# EAGLE board Sheild Generator - Main unit (EAGLE 7.6.0)
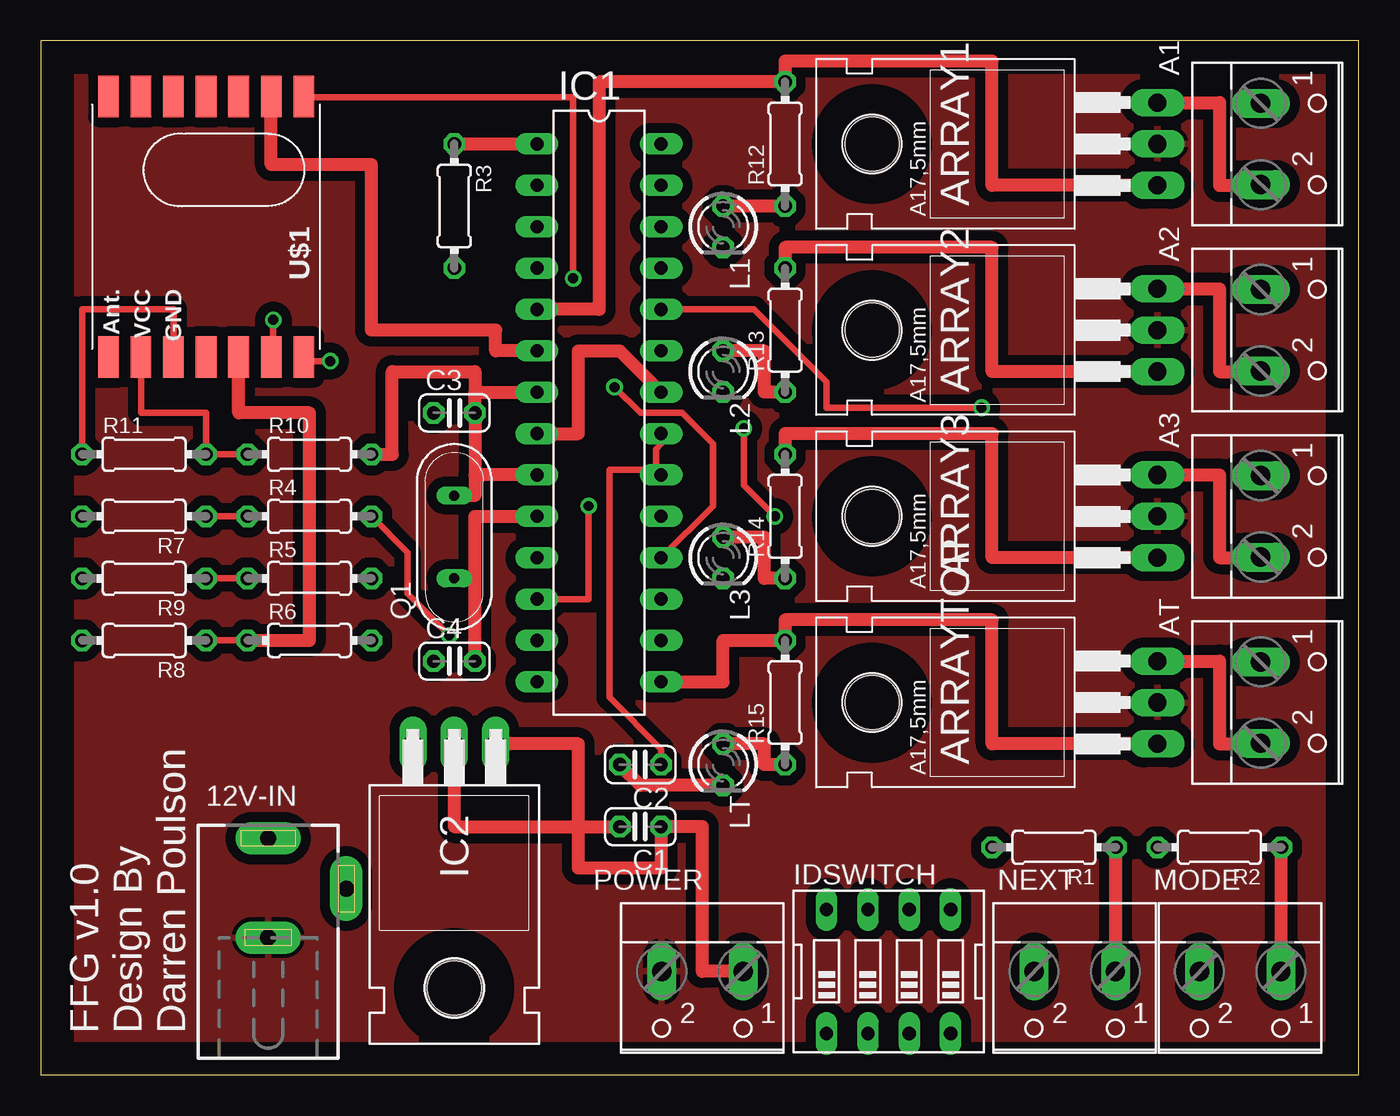
[diagram p0: board, top side]
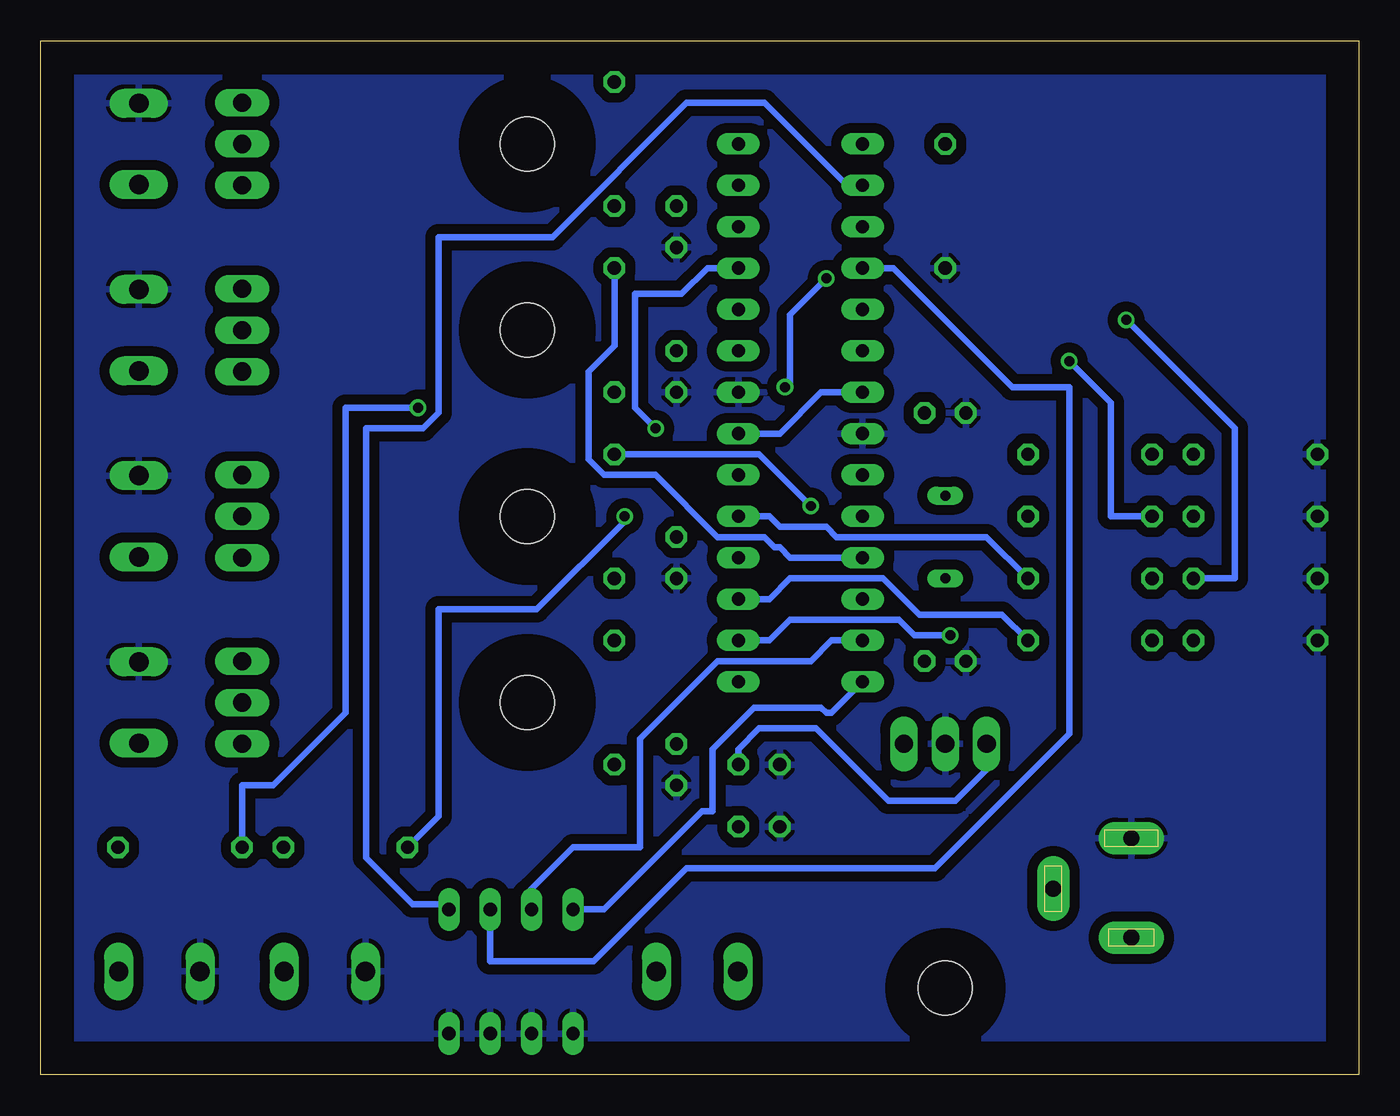
[diagram p1: board, bottom side, seen from below]

Size 80.95 x 63.49 mm. Coordinates in mm from the lower left corner, seen from the top.
Outline: 0,0 80.95,0 80.95,63.49 0,63.49 0,0
Copper layers (1*16): Top 0.035mm / dielectric 1.5mm / Bottom 0.035mm
Design rules "default *": minimum track width 16mil, minimum drill 24mil, track to track 24mil, track to pad 16mil, pad to pad 16mil, via to via 16mil, smd to smd 16mil, copper to edge 80mil, drill to drill 8mil, minimum pad ring 10mil, minimum via ring 8mil, stop-mask expansion 4mil, vias tented up to drill 0mil, thermal gap 10mil
Net classes: 1 GND: width 2.032 mm, drill 2.032 mm, clearance 2.032 mm; 2 +12V: width 4.064 mm, drill 4.064 mm, clearance 4.064 mm

## Footprints (pad centres in the part's own frame; a part is rotated, then mirrored left to right if it is on the bottom)
DCJ0202 = drill 1 pad 2 long: 1 0,3.1; 2 4.8,0; 3 0,-3
W237-102 = drill 1.194 long: 1 -2.5,-1.27; 2 2.5,-1.27
TO220 = drill 1.118 long: 1 -2.54,-6.35; 2 0,-6.35; 3 2.54,-6.35 | hole 3.302: 0,11.176
C025-024X044 = drill 0.813 octagon: 1 -1.27,0; 2 1.27,0
DIL28-3 = drill 0.813 long: 1 -16.51,-3.81; 2 -13.97,-3.81; 3 -11.43,-3.81; 4 -8.89,-3.81; 5 -6.35,-3.81; 6 -3.81,-3.81; 7 -1.27,-3.81; 8 1.27,-3.81; 9 3.81,-3.81; 10 6.35,-3.81; 11 8.89,-3.81; 12 11.43,-3.81; 13 13.97,-3.81; 14 16.51,-3.81; 15 16.51,3.81; 16 13.97,3.81; 17 11.43,3.81; 18 8.89,3.81; 19 6.35,3.81; 20 3.81,3.81; 21 1.27,3.81; 22 -1.27,3.81; 23 -3.81,3.81; 24 -6.35,3.81; 25 -8.89,3.81; 26 -11.43,3.81; 27 -13.97,3.81; 28 -16.51,3.81
TO220H = drill 1.118 long: 1 -2.54,-10.16; 2 0,-10.16; 3 2.54,-10.16 | hole 3.302: 0,4.826
EDG-04 = drill 0.813 long: 1 -3.81,-3.81; 2 -1.27,-3.81; 3 1.27,-3.81; 4 3.81,-3.81; 5 3.81,3.81; 6 1.27,3.81; 7 -1.27,3.81; 8 -3.81,3.81
LED3MM = drill 0.813 octagon: A -1.27,0; K 1.27,0
QS = drill 0.61 long: 1 -2.54,0; 2 2.54,0
0204/7 = drill 0.813 octagon: 1 -3.81,0; 2 3.81,0
RFM12B = smd 2.54 x 1.27: ANT 8,-6; FFS -8,2; GND 8,-2; IRQ -8,4; P$8 -8,0; P$9 -8,-2; P$10 -8,-4; P$12 -8,-6; P$16 8,0; SCK 8,4; SDI 8,2; SDO -8,6; SEL 8,6; VDD 8,-4

## Placement (x,y rotation side)
12V-IN  DCJ0202  [DCJ0202]  13.97,11.43 0 top
A1  [W237-102]  76.2,57.15 270 top
A2  [W237-102]  76.2,45.72 270 top
A3  [W237-102]  76.2,34.29 270 top
ARRAY1  TIP122  [TO220]  62.23,57.15 90 top
ARRAY2  TIP122  [TO220]  62.23,45.72 90 top
ARRAY3  TIP122  [TO220]  62.23,34.29 90 top
ARRAYTOP  TIP122  [TO220]  62.23,22.86 90 top
AT  [W237-102]  76.2,22.86 270 top
C1  [C025-024X044]  36.83,15.24 180 top
C2  [C025-024X044]  36.83,19.05 180 top
C3  [C025-024X044]  25.4,40.64 0 top
C4  [C025-024X044]  25.4,25.4 0 top
IC1  ATMEGA168-PU  [DIL28-3]  34.29,40.64 270 top
IC2  7805T  [TO220H]  25.4,10.16 180 top
IDSWITCH  [EDG-04]  52.07,6.35 0 top
L1  [LED3MM]  41.91,52.07 270 top
L2  [LED3MM]  41.91,43.18 270 top
L3  [LED3MM]  41.91,31.75 270 top
LT  [LED3MM]  41.91,19.05 270 top
MODE  [W237-102]  73.66,5.08 180 top
NEXT  [W237-102]  63.5,5.08 180 top
POWER  [W237-102]  40.64,5.08 180 top
Q1  [QS]  25.4,33.02 90 top
R1  [0204/7]  62.23,13.97 180 top
R2  [0204/7]  72.39,13.97 180 top
R3  [0204/7]  25.4,53.34 270 top
R4  [0204/7]  16.51,34.29 0 top
R5  [0204/7]  16.51,30.48 0 top
R6  [0204/7]  16.51,26.67 0 top
R7  [0204/7]  6.35,34.29 180 top
R8  [0204/7]  6.35,26.67 180 top
R9  [0204/7]  6.35,30.48 180 top
R10  [0204/7]  16.51,38.1 0 top
R11  [0204/7]  6.35,38.1 0 top
R12  [0204/7]  45.72,57.15 90 top
R13  [0204/7]  45.72,45.72 90 top
R14  [0204/7]  45.72,34.29 90 top
R15  [0204/7]  45.72,22.86 90 top
U$1  RFM12B  [RFM12B]  10.16,52.07 270 top

## Library data of the parts
12V-IN = con-jack; OC_FARNELL: unknown; OC_NEWARK: unknown
A1-A3 AT MODE NEXT POWER = con-wago-500; MPN: 237-102; OC_FARNELL: unknown; OC_NEWARK: 70K9898
ARRAY1-ARRAY3 ARRAYTOP = transistor
C1-C4 = rcl
IC1 = Arduino-AVR
IC2 = adafruit
IDSWITCH Q1 = special
L1-L3 LT = led
R1-R15 = resistor
U$1 = JeeParts

## Nets
+5V: C2.1 IC1.7 IC1.20 IC1.21 IC2.3 R10.2
+12V: 12V-IN.3 ARRAY1.2 ARRAY2.2 ARRAY3.2 ARRAYTOP.2 POWER.2
GND: 12V-IN.1 A1.1 A2.1 A3.1 AT.1 C1.2 C2.2 C3.1 C4.1 IC1.8 IC1.22 IC2.2 IDSWITCH.1 IDSWITCH.2 IDSWITCH.3 IDSWITCH.4 L1.K L2.K L3.K LT.K MODE.2 NEXT.2 R3.2 R7.2 R8.2 R9.2 R11.1 U$1.GND
N$1: ARRAY1.1 IC1.5 R12.2
N$2: ARRAY2.1 IC1.11 R13.2
N$3: ARRAY3.1 IC1.12 R14.2
N$4: ARRAYTOP.1 IC1.15 R15.2
N$5: IC1.2 IDSWITCH.5
N$6: IC1.4 IDSWITCH.6
N$7: IC1.13 IDSWITCH.7
N$8: IC1.14 IDSWITCH.8
N$9: NEXT.1 R1.1
N$10: IC1.25 R1.2
N$11: A1.2 ARRAY1.3
N$12: A2.2 ARRAY2.3
N$13: A3.2 ARRAY3.3
N$14: ARRAYTOP.3 AT.2
N$15: IC1.24 R2.2
N$16: MODE.1 R2.1
N$17: C3.2 IC1.9 Q1.2
N$18: C1.1 IC2.1 POWER.1
N$19: C4.2 IC1.10 Q1.1
N$20: R4.1 R7.1 U$1.SEL
N$21: IC1.1 R3.1
N$22: R5.1 R9.1 U$1.SCK
N$23: R6.1 R8.1 U$1.SDI
N$26: IC1.6 U$1.IRQ
N$27: IC1.16 R4.2
N$28: IC1.19 R5.2
N$29: IC1.17 R6.2
N$30: IC1.18 U$1.SDO
N$31: R10.1 R11.2 U$1.VDD
N$33: L1.A R12.1
N$34: L2.A R13.1
N$35: L3.A R14.1
N$36: LT.A R15.1

## Tracks (layer width: path | path; a pad name or v marks a point on that pad's centre or on a via)
+5V
  Top 0.406: 37.78,37.15 37.78,38.42 38.1,38.73 IC1.21 | 37.78,37.15 34.92,37.15 34.92,23.18 38.1,20 C2.1 | 37.78,37.15 IC1.20
  Top 0.813: R10.2 21.59,38.1 21.59,43.18 26.67,43.18 26.67,41.91 | 26.67,40.64 26.67,41.91 | 26.67,41.91 IC1.7
  Bottom 0.406: IC1.21 35.56,39.37 33.02,41.91 IC1.7 | C2.1 38.1,20 36.83,21.27 33.34,21.27 28.89,16.83 24.77,16.83 22.86,18.73 IC2.3
+12V
  pour Top: 0,62.23 80.01,62.23 80.01,1.27 0,1.27
GND
  Top 0.406: R11.1 2.54,46.99 8.16,46.99 U$1.GND
  Top 0.813: IC2.2 25.4,15.24 C1.2 | IC1.8 33.02,39.37 33.02,44.45 35.56,44.45 IC1.22 | LT.K 36.83,17.78 C2.2
  pour Bottom: 0,62.23 80.01,62.23 80.01,1.27 0,1.27
N$1
  Top 0.813: ARRAY1.1 58.42,54.61 58.42,62.23 45.72,62.23 R12.2 34.29,60.96 34.29,46.99 IC1.5
N$2
  Top 0.813: ARRAY2.1 58.42,43.18 58.42,50.8 45.72,50.8 R13.2
  Bottom 0.406: IC1.11 34.92,31.75 35.56,32.38 35.88,32.38 36.51,33.02 39.37,33.02 43.18,36.83 46.36,36.83 47.31,37.78 47.31,43.18 45.72,44.77 R13.2
N$3  (via drill 0.61)
  Top 0.406: IC1.12 33.66,29.21 v33.66,34.92
  Top 0.813: ARRAY3.1 58.42,31.75 58.42,39.37 45.72,39.37 R14.2
  Bottom 0.406: v33.66,34.92 36.83,38.1 R14.2
N$4
  Top 0.813: ARRAYTOP.1 58.42,20.32 58.42,27.94 45.72,27.94 R15.2 41.91,26.67 41.91,24.13 IC1.15
N$5
  Bottom 0.406: IDSWITCH.5 56.2,10.48 58.1,10.48 60.96,13.34 60.96,39.69 57.47,39.69 56.52,40.64 56.52,51.44 49.53,51.44 41.28,59.69 36.51,59.69 31.43,54.61 IC1.2
N$6
  Bottom 0.406: IDSWITCH.6 53.34,6.99 46.99,6.99 41.28,12.7 26.04,12.7 17.78,20.95 17.78,42.23 21.27,42.23 28.57,49.53 IC1.4
N$7
  Bottom 0.406: IC1.13 32.39,26.67 33.66,25.4 39.37,25.4 44.13,20.64 44.13,13.97 48.26,13.97 50.8,11.43 IDSWITCH.7
N$8
  Bottom 0.406: IC1.14 32.39,22.23 32.7,22.23 33.02,22.54 37.15,22.54 39.69,20 39.69,16.19 40.32,16.19 46.36,10.16 IDSWITCH.8
N$9
  Top 0.813: NEXT.1 66.04,6.35 R1.1
N$10  (via drill 0.61)
  Top 0.406: v45.09,34.29 43.18,36.2 v43.18,39.69
  Bottom 0.406: R1.2 56.52,15.88 56.52,28.57 50.48,28.57 45.09,33.97 v45.09,34.29 | v43.18,39.69 44.45,40.96 44.45,47.94 41.59,47.94 40.01,49.53 IC1.25
N$11
  Top 0.813: ARRAY1.3 72.39,59.69 72.39,54.61 74.93,54.61 A1.2
N$12
  Top 0.813: ARRAY2.3 72.39,48.26 72.39,43.18 74.93,43.18 A2.2
N$13
  Top 0.813: ARRAY3.3 72.39,36.83 72.39,31.75 74.93,31.75 A3.2
N$14
  Top 0.813: ARRAYTOP.3 72.39,25.4 72.39,20.32 74.93,20.32 AT.2
N$15  (via drill 0.61)
  Top 0.406: v57.79,40.96 48.26,40.96 48.26,42.55 43.81,46.99 IC1.24
  Bottom 0.406: R2.2 68.58,17.78 66.68,17.78 62.23,22.23 62.23,40.96 v57.79,40.96
N$16
  Top 0.813: MODE.1 76.2,6.35 R2.1
N$17
  Top 0.813: C3.2 26.67,36.83 | 26.67,36.83 26.67,35.56 Q1.2 | IC1.9 26.67,36.83
N$18
  Top 0.813: POWER.1 40.64,6.35 40.64,15.24 C1.1 38.1,12.7 33.02,12.7 33.02,20.32 IC2.1
N$19
  Top 0.813: C4.2 26.67,30.48 | Q1.1 26.67,30.48 | 26.67,30.48 26.67,34.29 IC1.10
N$20  (via drill 0.61)
  Top 0.406: R7.1 R4.1 | v17.78,43.81 16.19,43.81 U$1.SEL
  Bottom 0.406: v17.78,43.81 15.24,41.27 15.24,34.29 R4.1
N$21
  Top 0.813: R3.1 IC1.1
N$22  (via drill 0.61)
  Top 0.406: R9.1 R5.1 | v14.29,46.35 14.29,44.13 U$1.SCK
  Bottom 0.406: v14.29,46.35 7.62,39.69 7.62,30.48 R9.1
N$23
  Top 0.406: R8.1 R6.1
  Top 0.813: R6.1 16.51,26.67 16.51,40.64 12.16,40.64 U$1.SDI
N$26
  Top 0.813: IC1.6 27.94,44.45 27.94,45.72 20.32,45.72 20.32,55.88 14.16,55.88 U$1.IRQ
N$27  (via drill 0.61)
  Top 0.406: R4.2 22.54,32.07 22.54,29.53 v25.08,26.99
  Bottom 0.406: v25.08,26.99 27.31,26.99 28.26,27.94 34.92,27.94 36.2,26.67 IC1.16
N$28
  Bottom 0.406: R5.2 22.86,33.02 32.07,33.02 32.7,33.66 35.56,33.66 36.2,34.29 IC1.19
N$29
  Bottom 0.406: R6.2 21.91,28.26 26.99,28.26 29.21,30.48 34.92,30.48 36.2,29.21 IC1.17
N$30  (via drill 0.61)
  Top 0.406: v32.7,48.9 32.7,60.01 16.19,60.01 U$1.SDO | v35.24,42.23 36.83,40.64 39.37,40.64 41.28,38.73 41.28,34.92 IC1.18
  Bottom 0.406: v32.7,48.9 34.92,46.67 34.92,42.23 v35.24,42.23
N$31
  Top 0.406: U$1.VDD 6.16,40.64 10.16,40.64 R11.2 R10.1
N$33
  Top 0.813: R12.1 L1.A
N$34
  Top 0.813: R13.1 44.45,41.91 44.45,44.45 L2.A
N$35
  Top 0.813: R14.1 44.45,30.48 44.45,33.02 L3.A
N$36
  Top 0.813: R15.1 44.45,19.05 44.45,20.32 LT.A

## Text on the board
tNames: FFG v1.0 / Design By / Darren Poulson